# EAGLE board L1-Small (EAGLE 7.2.0)
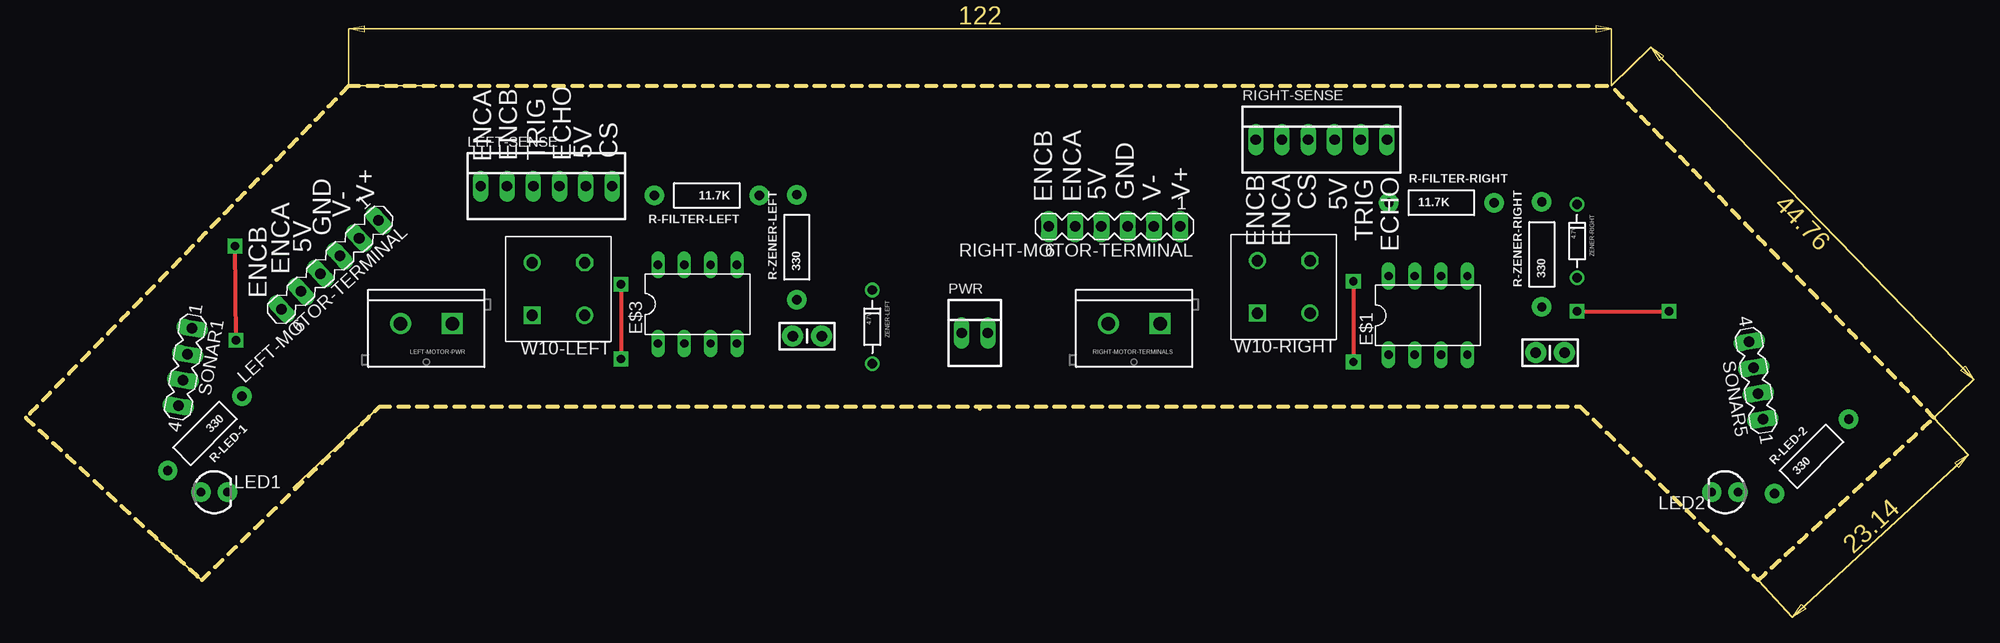
[diagram p0: board, top side]
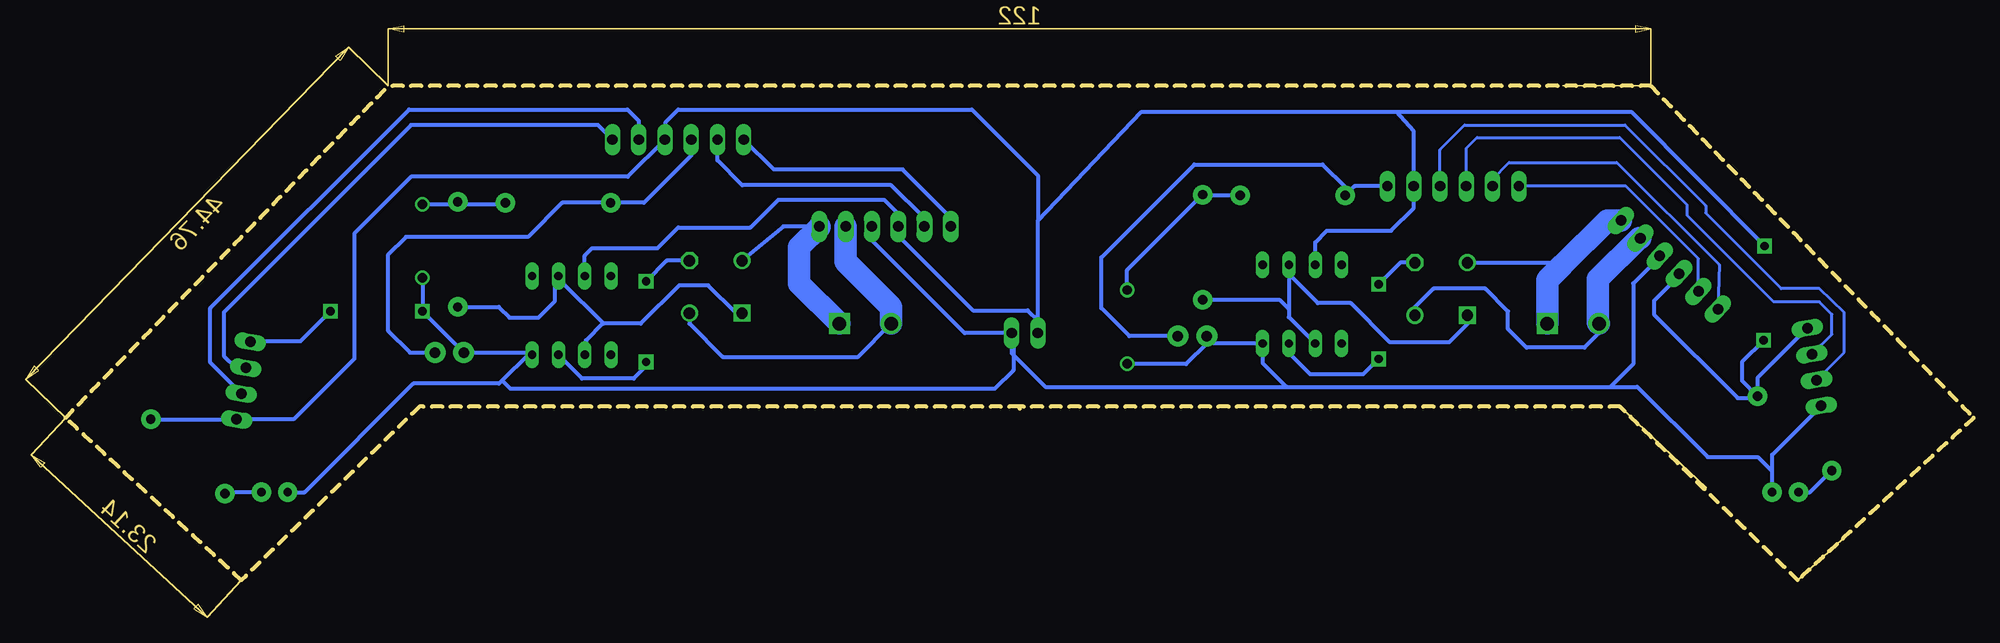
[diagram p1: board, bottom side, seen from below]

Size 184.4 x 47.8 mm. Coordinates in mm from the lower left corner, seen from the top.
Outline: 92.2,16.6 92.2,16.8
Outline: 92.2,16.8 150.2,16.8 167.4,0 184.4,15.7 153.2,47.8 31.2,47.8 0,15.7 17,0 34.2,16.8 92.2,16.8
Copper layers (1*16): Top 0.035mm / dielectric 1.5mm / Bottom 0.035mm
Design rules "default": minimum track width 10mil, minimum drill 24mil, track to track 8mil, track to pad 8mil, pad to pad 8mil, via to via 8mil, smd to smd 8mil, copper to edge 40mil, drill to drill 8mil, minimum pad ring 10mil, minimum via ring 8mil, stop-mask expansion 4mil, vias tented up to drill 0mil, thermal gap 10mil

## Footprints (pad centres in the part's own frame; a part is rotated, then mirrored left to right if it is on the bottom)
CAP-PTH-SMALL-KIT = drill 1.016 pad 2.032: 1 -1.397,0; 2 1.397,0
DIL08 = drill 0.813 long: 1 -3.81,-3.81; 2 -1.27,-3.81; 3 1.27,-3.81; 4 3.81,-3.81; 5 3.81,3.81; 6 1.27,3.81; 7 -1.27,3.81; 8 -3.81,3.81
LED3MM = drill 0.813 pad 1.88: A -1.27,0; K 1.27,0
SCREWTERMINAL-5MM-2 = drill 1.3 pad 2.032 square: 1 0,0 | drill 1.3 pad 2.032: 2 5,0
MA06-1 = drill 1.016 long: 1 -6.35,0; 2 -3.81,0; 3 -1.27,0; 4 1.27,0; 5 3.81,0; 6 6.35,0
22-23-2061 = drill 1 long: 1 -6.35,0; 2 -3.81,0; 3 -1.27,0; 4 1.27,0; 5 3.81,0; 6 6.35,0
22-23-2021 = drill 1 long: 1 -1.27,0; 2 1.27,0
AXIAL-0.4 = drill 0.9 pad 1.88: P$1 -5.08,0; P$2 5.08,0
MA04-1 = drill 1.016 long: 1 -3.81,0; 2 -1.27,0; 3 1.27,0; 4 3.81,0
W10 = drill 1.1: AC1 0,5.08; AC2 5.08,0 | drill 1.1 octagon: GND 0,0 | drill 1.1 square: VCC+ 5.08,5.08
DIODE-ZENER = drill 0.9: P$1 -3.556,0; P$2 3.556,0

## Placement (x,y rotation side)
CAP-LEFT  100uF  [CAP-PTH-SMALL-KIT]  75.5,23.6 180 top
CAP-RIGHT  100uF  [CAP-PTH-SMALL-KIT]  147.3,22 180 top
E$1  [DIL08]  135.5,25.6 0 top
E$3  [DIL08]  64.9,26.7 0 top
LED1  Blue  [LED3MM]  18.2,8.5 0 top
LED2  Blue  [LED3MM]  164.2,8.5 180 top
LEFT-MOTOR-PWR  [SCREWTERMINAL-5MM-2]  41.2,24.8 180 top
LEFT-MOTOR-TERMINAL  [MA06-1]  29.4,30.5 222.5 top
LEFT-SENSE  [22-23-2061]  50.3,38.1 0 top
PWR  5V  [22-23-2021]  91.7,23.9 0 top
R-FILTER-LEFT  11.7K  [AXIAL-0.4]  65.8,37.2 180 top
R-FILTER-RIGHT  11.7K  [AXIAL-0.4]  136.8,36.5 0 top
R-LED-1  330  [AXIAL-0.4]  17.3,14.2 225 top
R-LED-2  330  [AXIAL-0.4]  172.57,11.98 45 top
R-ZENER-LEFT  330  [AXIAL-0.4]  74.5,32.2 90 top
R-ZENER-RIGHT  330  [AXIAL-0.4]  146.5,31.5 90 top
RIGHT-MOTOR-TERMINAL  [MA06-1]  105.2,34.2 180 top
RIGHT-MOTOR-TERMINALS  [SCREWTERMINAL-5MM-2]  109.6,24.8 180 top
RIGHT-SENSE  [22-23-2061]  125.2,42.6 0 top
SONAR1  [MA04-1]  15.4,20.61 260 top
SONAR5  [MA04-1]  167.2,19.3 100 top
W10-LEFT  [W10]  54,30.7 180 top
W10-RIGHT  [W10]  124.1,30.9 180 top
ZENER-LEFT  4.7V  [DIODE-ZENER]  81.8,24.5 270 top
ZENER-RIGHT  4.7V  [DIODE-ZENER]  149.9,32.8 270 top

## Library data of the parts
CAP-LEFT CAP-RIGHT R-FILTER-LEFT R-FILTER-RIGHT R-LED-1 R-LED-2 R-ZENER-LEFT R-ZENER-RIGHT = SparkFun-Passives
E$1 E$3 = 40xx
LED1 LED2 = SparkFun-LED
LEFT-MOTOR-PWR RIGHT-MOTOR-TERMINALS = SparkFun-Connectors
LEFT-MOTOR-TERMINAL RIGHT-MOTOR-TERMINAL SONAR1 SONAR5 = con-lstb
LEFT-SENSE PWR RIGHT-SENSE = con-molex
W10-LEFT W10-RIGHT = w10
ZENER-LEFT ZENER-RIGHT = SparkFun-DiscreteSemi

## Nets
S$2: CAP-LEFT.2 CAP-RIGHT.2 E$1.4 E$3.4 LED1.K LED2.K LEFT-MOTOR-TERMINAL.3 PWR.2 RIGHT-MOTOR-TERMINAL.3 SONAR1.4 SONAR5.4 ZENER-LEFT.P$2 ZENER-RIGHT.P$2
S$3: LEFT-MOTOR-PWR.1 LEFT-MOTOR-TERMINAL.1 W10-LEFT.AC2
S$4: LEFT-MOTOR-PWR.2 LEFT-MOTOR-TERMINAL.2 W10-LEFT.AC1
S$5: RIGHT-MOTOR-TERMINAL.2 RIGHT-MOTOR-TERMINALS.2 W10-RIGHT.AC1
S$6: RIGHT-MOTOR-TERMINAL.1 RIGHT-MOTOR-TERMINALS.1 W10-RIGHT.AC2
S$7: E$3.2 E$3.6 R-ZENER-LEFT.P$1 W10-LEFT.VCC+
S$8: E$1.2 E$1.6 R-ZENER-RIGHT.P$1 W10-RIGHT.VCC+
S$9: LED1.A R-LED-1.P$2
S$10: E$3.3 W10-LEFT.GND
S$11: E$1.3 W10-RIGHT.GND
S$12: R-FILTER-LEFT.P$1 R-ZENER-LEFT.P$2 ZENER-LEFT.P$1
S$13: CAP-LEFT.1 LEFT-SENSE.6 R-FILTER-LEFT.P$2
S$14: R-FILTER-RIGHT.P$2 R-ZENER-RIGHT.P$2 ZENER-RIGHT.P$1
S$15: CAP-RIGHT.1 R-FILTER-RIGHT.P$1 RIGHT-SENSE.3
S$16: LED2.A R-LED-2.P$1
S$17: LEFT-SENSE.4 SONAR1.3
S$18: LEFT-SENSE.3 SONAR1.2
S$19: LEFT-MOTOR-TERMINAL.6 LEFT-SENSE.2
S$20: LEFT-MOTOR-TERMINAL.5 LEFT-SENSE.1
S$21: E$1.7 E$3.7 LEFT-MOTOR-TERMINAL.4 LEFT-SENSE.5 PWR.1 R-LED-1.P$1 R-LED-2.P$2 RIGHT-MOTOR-TERMINAL.4 RIGHT-SENSE.4 SONAR1.1 SONAR5.1
S$22: RIGHT-MOTOR-TERMINAL.5 RIGHT-SENSE.2
S$23: RIGHT-MOTOR-TERMINAL.6 RIGHT-SENSE.1
S$24: RIGHT-SENSE.6 SONAR5.3
S$25: RIGHT-SENSE.5 SONAR5.2

## Tracks (layer width: path | path; a pad name or v marks a point on that pad's centre or on a via)
S$2  (via drill 0.8 pad 1.42)
  Top 0.406: v149.9,26 v158.8,26
  Bottom 0.406: LED1.K 19.47,10.5 | 19.47,10.5 19.47,12.13 SONAR1.4 | 92.97,22.6 PWR.2 97.5,23.9 106.5,32.9 106.5,34.17 RIGHT-MOTOR-TERMINAL.3 | 92.97,22.6 92.97,21.97 89.7,18.7 66.4,18.7 | 66.4,18.7 35.1,18.7 | 35.1,18.7 32.5,18.7 25.7,11.9 20.87,11.9 19.47,10.5 | 66.4,18.7 68.71,21.01 E$3.4 73.39,22.89 CAP-LEFT.2 74.1,22.9 76.1,20.9 81.76,20.9 ZENER-LEFT.P$2 | LEFT-MOTOR-TERMINAL.3 30.34,31.26 32.9,28.7 32.9,20.9 35.1,18.7 | E$1.4 139.52,22 CAP-RIGHT.2 v149.9,26 ZENER-RIGHT.P$2 | E$1.4 139.31,20.71 | 92.97,22.6 92.8,22.43 92.8,20.3 94.6,18.5 141.4,18.5 142.2,19.3 | v158.8,26 161.7,23.1 166.49,23.1 SONAR5.4 | LED2.K 161.3,8.5 150.8,19 142.5,19 142.2,19.3 | E$1.4 139.71,21.79 142.2,19.3
S$3
  Bottom 0.406: W10-LEFT.AC2 39.9,30.7 39.7,30.5
  Bottom 2.184: LEFT-MOTOR-TERMINAL.1 35.41,34.79 39.7,30.5 41.2,29 LEFT-MOTOR-PWR.1
S$4
  Bottom 0.406: LEFT-MOTOR-PWR.2 36.2,23.9 37.6,22.5 43.2,22.5 45,24.3 45,26 47.2,28.2 52.2,28.2 54.1,26.3 54.1,25.72 W10-LEFT.AC1
  Bottom 2.184: LEFT-MOTOR-TERMINAL.2 32.33,33.07 36.3,29.1 36.3,24.9 LEFT-MOTOR-PWR.2
S$5
  Bottom 0.406: W10-RIGHT.AC1 124.1,24.8 120.9,21.6 107.8,21.6 RIGHT-MOTOR-TERMINALS.2
  Bottom 2.184: RIGHT-MOTOR-TERMINALS.2 104.6,26.4 109,30.8 RIGHT-MOTOR-TERMINAL.2
S$6
  Bottom 0.406: RIGHT-MOTOR-TERMINAL.1 115.02,34.2 W10-RIGHT.AC2
  Bottom 2.184: RIGHT-MOTOR-TERMINAL.1 111.55,34.15 113.5,32.2 113.5,28.7 RIGHT-MOTOR-TERMINALS.1
S$7
  Bottom 0.406: E$3.6 66.17,29.6 | 66.17,29.6 66.17,26.2 | 66.17,26.2 66.17,25.43 E$3.2 | R-ZENER-LEFT.P$1 67.09,27.12 66.17,26.2 | W10-LEFT.VCC+ 48.92,24.78 50.7,23 56.4,23 60.2,26.8 63.37,26.8 66.17,29.6
S$8
  Bottom 0.406: W10-RIGHT.VCC+ 119.62,25.82 122.3,28.5 125.1,28.5 128.8,24.8 132.4,24.8 | 132.4,24.8 132.5,24.8 134.1,23.2 134.1,21.92 E$1.2 | 136.55,28.95 136.77,29.17 E$1.6 136.8,29.44 | 136.55,28.95 132.4,24.8 | R-ZENER-RIGHT.P$1 142.52,26.42 141.5,25.4 138.7,25.4 137.1,27 137.1,28.4 136.55,28.95
S$9
  Bottom 0.406: LED1.A 15.82,8.5 R-LED-1.P$2
S$10  (via drill 0.8 pad 1.42)
  Top 0.406: v57.5,28.6 v57.5,21.4
  Bottom 0.406: W10-LEFT.GND 55.4,30.7 v57.5,28.6 | v57.5,21.4 59,19.9 64.1,19.9 66.2,22 66.2,22.86 E$3.3
S$11  (via drill 0.8 pad 1.42)
  Top 0.406: v128.3,28.9 v128.3,21.1
  Bottom 0.406: W10-RIGHT.GND 126.3,30.9 v128.3,28.9 | v128.3,21.1 128.3,20.7 129.5,19.5 134.48,19.5 E$1.3
S$12
  Bottom 0.406: ZENER-LEFT.P$1 81.8,29.98 74.89,36.89 74.58,37.2 | 74.58,37.2 R-ZENER-LEFT.P$2 | R-FILTER-LEFT.P$1 74.58,37.2
S$13
  Bottom 0.305: R-FILTER-LEFT.P$2 60.72,38
  Bottom 0.406: CAP-LEFT.1 81.6,23.6 84.3,26.3 84.3,31.2 75.3,40.2 62.92,40.2 60.72,38 | LEFT-SENSE.6 59.82,38.1 R-FILTER-LEFT.P$2
S$14
  Bottom 0.406: R-ZENER-RIGHT.P$2 146.72,36.36 ZENER-RIGHT.P$1 142.02,36.36 R-FILTER-RIGHT.P$2
S$15
  Bottom 0.406: CAP-RIGHT.1 151.1,22 153.2,24.1 153.2,31.5 151.5,33.2 139.7,33.2 136.4,36.5 R-FILTER-RIGHT.P$1 128.5,36.5 123.93,41.07 RIGHT-SENSE.3
S$16
  Bottom 0.406: LED2.A 168.86,8.5 R-LED-2.P$1
S$17
  Bottom 0.305: SONAR1.3 12.5,22.04 12.5,25.9 14.9,28.2 18.6,28.2 25.9,35.5 25.9,36.2 33.7,44 49.2,44 51.57,41.63 LEFT-SENSE.4
S$18
  Bottom 0.305: SONAR1.2 13.7,23.78 13.7,25.7 14.9,26.9 19.3,26.9 27.7,35.3 27.7,36.3 34.2,42.8 48,42.8 49.03,41.77 LEFT-SENSE.3
S$19
  Bottom 0.305: LEFT-SENSE.2 46.49,38.71 44.9,40.4 34.5,40.4 24.6,30.5 24.7,26.23 LEFT-MOTOR-TERMINAL.6
S$20
  Bottom 0.305: LEFT-MOTOR-TERMINAL.5 26.59,31.09 33.6,38.1 LEFT-SENSE.1
S$21  (via drill 0.8 pad 1.42)
  Top 0.406: v20.2,32.3 v20.3,23.2
  Bottom 0.406: R-LED-2.P$2 167.88,15.57 SONAR5.1 162.35,15.55 156.5,21.4 156.5,33.5 151,39 130.07,39 RIGHT-SENSE.4 126.4,42.67 126.4,44.3 125.2,45.5 96.8,45.5 90.43,39.13 90.43,34.77 | SONAR1.1 20.89,19.53 R-LED-1.P$1 | LEFT-MOTOR-TERMINAL.4 28.46,29.44 30.9,27 30.9,25.7 22.8,17.6 21.08,17.6 R-LED-1.P$1 | PWR.1 90.43,25.1 | 90.43,25.1 90.43,34.77 | 90.43,34.77 80.4,45.3 55.8,45.3 | 55.8,45.3 33.1,45.3 v20.2,32.3 | v20.3,23.2 22.4,21.1 22.4,19.3 R-LED-1.P$1 | E$3.7 63.63,32.67 62.5,33.8 56.3,33.8 54.1,36 LEFT-SENSE.5 54.11,43.41 55.8,45.3 | 90.43,25.1 91.43,26.1 96.7,26.1 103.93,33.33 RIGHT-MOTOR-TERMINAL.4 103.9,34.23 103.9,35.4 105.3,36.8 115.5,36.8 118.2,34.1 125.2,34.1 127.2,32.1 133.5,32.1 134.23,31.37 E$1.7
S$22
  Bottom 0.406: RIGHT-MOTOR-TERMINAL.5 101.39,34.99 104.6,38.2 119,38.2 121.4,40.6 RIGHT-SENSE.2
S$23
  Bottom 0.406: RIGHT-MOTOR-TERMINAL.6 98.85,35.05 103.5,39.7 115.95,39.7 RIGHT-SENSE.1
S$24
  Bottom 0.406: RIGHT-SENSE.6 132.95,44 151,44 169.1,25.9 169.1,21.7 167.95,20.55 SONAR5.3
S$25
  Bottom 0.406: SONAR5.2 170.4,21.03 170.4,26.3 151.2,45.5 130.1,45.5 129.01,44.41 RIGHT-SENSE.5

## Text on the board
tPlace: ENCA | ENCB | TRIG | ECHO | 5V | CS | V+ | ENCB | ENCA | 5V | GND | V- | V+ | CS | 5V | V- | GND | ENCB | ENCA | TRIG | 5V | ECHO | ENCA | ENCB